# EAGLE board Controller (EAGLE 7.1.0)
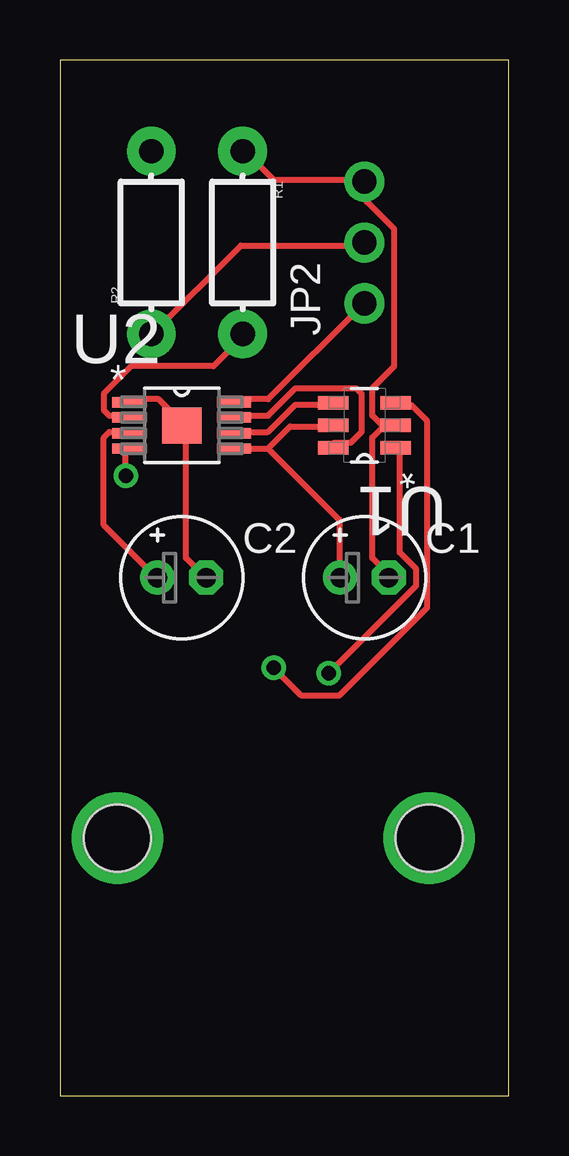
[diagram p0: board, top side]
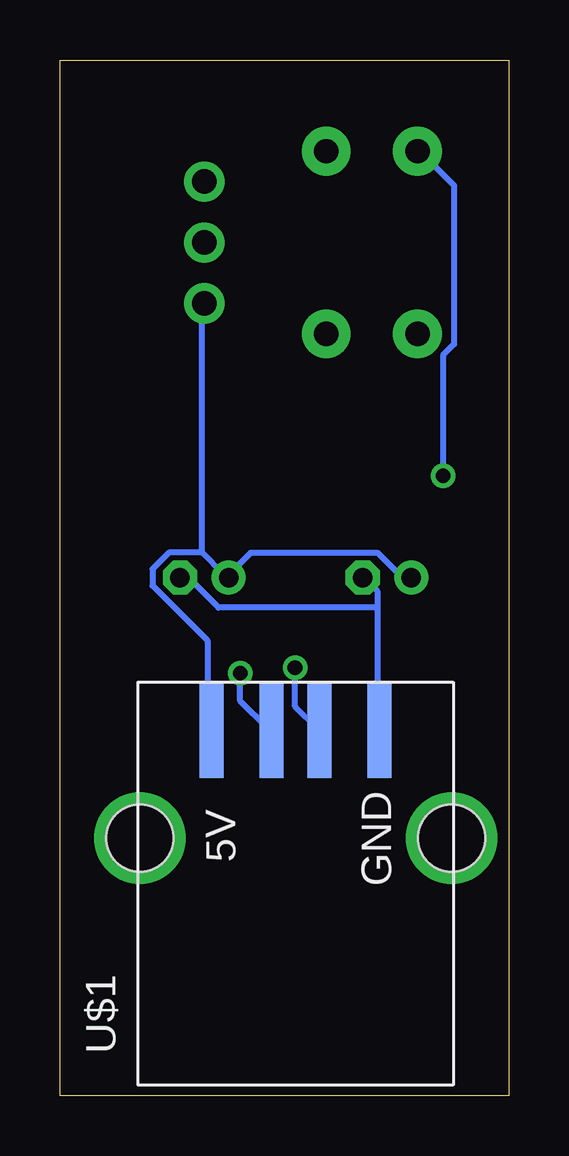
[diagram p1: board, bottom side, seen from below]

Size 18.72 x 43.17 mm. Coordinates in mm from the lower left corner, seen from the top.
Outline: 0,0 18.72,0 18.72,43.17 0,43.17 0,0
Copper layers (1*16): Top 0.035mm / dielectric 1.5mm / Bottom 0.035mm
Design rules "default": minimum track width 10mil, minimum drill 24mil, track to track 8mil, track to pad 8mil, pad to pad 8mil, via to via 8mil, smd to smd 8mil, copper to edge 40mil, drill to drill 8mil, minimum pad ring 10mil, minimum via ring 8mil, stop-mask expansion 4mil, vias tented up to drill 0mil, thermal gap 10mil

## Footprints (pad centres in the part's own frame; a part is rotated, then mirrored left to right if it is on the bottom)
E2-5 = drill 0.813 pad 1.422: + -1.016,0 | drill 0.813 pad 1.422 octagon: - 1.016,0
1X03-CLEANBIG = drill 1.016 pad 1.676: 1 -2.54,0; 2 0,0; 3 2.54,0
AXIAL-0.3-KIT = drill 1.016 pad 2.032: P$1 -3.81,0; P$2 3.81,0
SOT95P280X145-6N = smd 1.27 x 0.559: 1 -1.295,0.94; 2 -1.295,0; 3 -1.295,-0.94; 4 1.295,-0.94; 5 1.295,0; 6 1.295,0.94
SOP65P490X110-9N = smd 1.422 x 0.432: 1 -2.184,0.965; 2 -2.184,0.33; 3 -2.184,-0.33; 4 -2.184,-0.965; 5 2.184,-0.965; 6 2.184,-0.33; 7 2.184,0.33; 8 2.184,0.965 | smd 1.651 x 1.499: 9 0,0
USB_4UCON_18666_318 = drill 2.8: P$1 -4.5,6.5; P$2 -4.5,-6.5 | smd 4 x 1: USB+ 0,-1; USB- 0,1; USB_5V 0,3.5; USB_GND 0,-3.5 | hole 2.8: -4.5,6.5; -4.5,-6.5

## Placement (x,y rotation side)
C1  [E2-5]  12.7,21.59 0 top
C2  [E2-5]  5.08,21.59 0 top
FRAME1  FRAME-LETTER  [CREATIVE_COMMONS]  33.02,-8.89 0 top  (outside the outline)
JP2  [1X03-CLEANBIG]  12.7,35.56 90 top
R1  [AXIAL-0.3-KIT]  7.62,35.56 270 top
R2  [AXIAL-0.3-KIT]  3.81,35.56 90 top
U1  TPD4S009DBVR  [SOT95P280X145-6N]  12.7,27.94 180 top
U2  TPS2511DGN  [SOP65P490X110-9N]  5.08,27.94 0 top
U$1  SPARKFUN_USB_A  [USB_4UCON_18666_318]  8.89,15.24 90 bottom

## Library data of the parts
C1 C2 JP2 = adafruit
FRAME1 = SparkFun-Aesthetics
R1 R2 = SparkFun-Passives
U1 = Texas Instruments_By_element14_Batch_1; MPN: TPD4S009DBVR; OC_FARNELL: 1855143; OC_NEWARK: 33R2191; PACKAGE: SOT-23-6; SUPPLIER: TEXAS INSTRUMENTS
U2 = TI-TPS2511DGN; MPN: TPS2511DGN; OC_FARNELL: 2211372; OC_NEWARK: 44W8612; PACKAGE: MSOP-8; SUPPLIER: TEXAS INSTRUMENTS
U$1 = sparkfun-usb-a

## Nets
N$1: U1.3 U$1.USB+
N$2: U1.1 U$1.USB-
N$3: C1.+ C2.+ JP2.1 U1.5 U2.3 U2.5 U2.8 U$1.USB_5V
N$4: C1.- C2.- JP2.3 R1.P$1 U1.2 U2.1 U2.9 U$1.USB_GND
N$5: U1.6 U2.7
N$6: U1.4 U2.6
N$7: R1.P$2 U2.2
N$8: R2.P$2 U2.4
N$9: JP2.2 R2.P$1

## Tracks (layer width: path | path; a pad name or v marks a point on that pad's centre or on a via)
N$1  (via drill 0.61)
  Top 0.254: v8.91,17.83 10.06,16.69 11.66,16.69 15.32,20.34 15.32,28.12 14.63,28.8 14.17,28.8 U1.3
  Bottom 0.254: v8.91,17.83 8.91,16.23 8,15.32 U$1.USB+
N$2  (via drill 0.61)
  Top 0.254: v11.2,17.6 14.86,21.26 14.86,21.95 14.17,22.63 14.17,26.98 U1.1
  Bottom 0.254: v11.2,17.6 11.2,16.46 10.06,15.32 U$1.USB-
N$3
  Top 0.254: U2.8 7.32,29.03 8.69,29.03 12.57,32.92 JP2.1 | U2.3 2.74,27.66 2.06,27.66 1.83,27.43 1.83,23.77 3.89,21.72 C2.+ | 8.69,26.98 9.6,27.89 11.2,27.89 U1.5 | U2.5 8.69,26.98 | 8.69,26.98 11.66,24 11.66,21.72 C1.+
  Bottom 0.254: 12.8,22.63 14.17,22.63 14.86,21.95 14.86,21.26 12.57,18.97 12.57,15.32 U$1.USB_5V | 12.8,22.63 11.89,21.72 C1.+ 11.66,21.72 10.74,22.63 5.49,22.63 4.57,21.72 4.12,21.72 C2.+ | 12.8,22.63 12.8,32.92 JP2.1
N$4
  Top 0.254: R1.P$1 7.77,39.32 8.91,38.18 12.57,38.18 JP2.3 12.8,37.95 12.8,37.26 13.95,36.12 13.95,30.4 13.03,29.49 13.03,28.35 13.49,27.89 | 13.49,27.89 13.95,27.89 U1.2 13.49,27.89 | 13.49,27.89 13.03,27.43 13.03,22.4 13.72,21.72 C1.- | U2.1 2.97,29.03 4.12,29.03 5.03,28.12 U2.9 5.26,27.89 5.26,22.4 5.94,21.72 C2.-
  Bottom 0.254: 5.49,20.34 5.49,21.03 5.94,21.49 C2.- | 5.49,20.34 5.49,15.32 U$1.USB_GND | 5.49,20.34 12.12,20.34 13.26,21.49 13.72,21.49 C1.-
N$5
  Top 0.254: U1.6 11.43,27.2 12.12,27.2 12.57,27.66 12.57,29.26 12.34,29.49 9.83,29.49 8.69,28.35 7.32,28.35 U2.7
N$6
  Top 0.254: U1.4 11.2,28.8 9.83,28.8 8.69,27.66 7.32,27.66 U2.6
N$7
  Top 0.254: U2.2 2.74,28.35 2.06,28.35 1.83,28.57 1.83,29.26 2.97,30.4 6.4,30.4 7.54,31.55 R1.P$2
N$8  (via drill 0.61)
  Top 0.254: v2.74,25.83 2.74,26.98 U2.4
  Bottom 0.254: v2.74,25.83 2.74,30.86 2.29,31.32 2.29,37.95 3.66,39.32 R2.P$2
N$9
  Top 0.254: JP2.2 12.57,35.43 7.54,35.43 3.89,31.77 R2.P$1